# EAGLE board HomeAutomation (EAGLE 9.6.2)
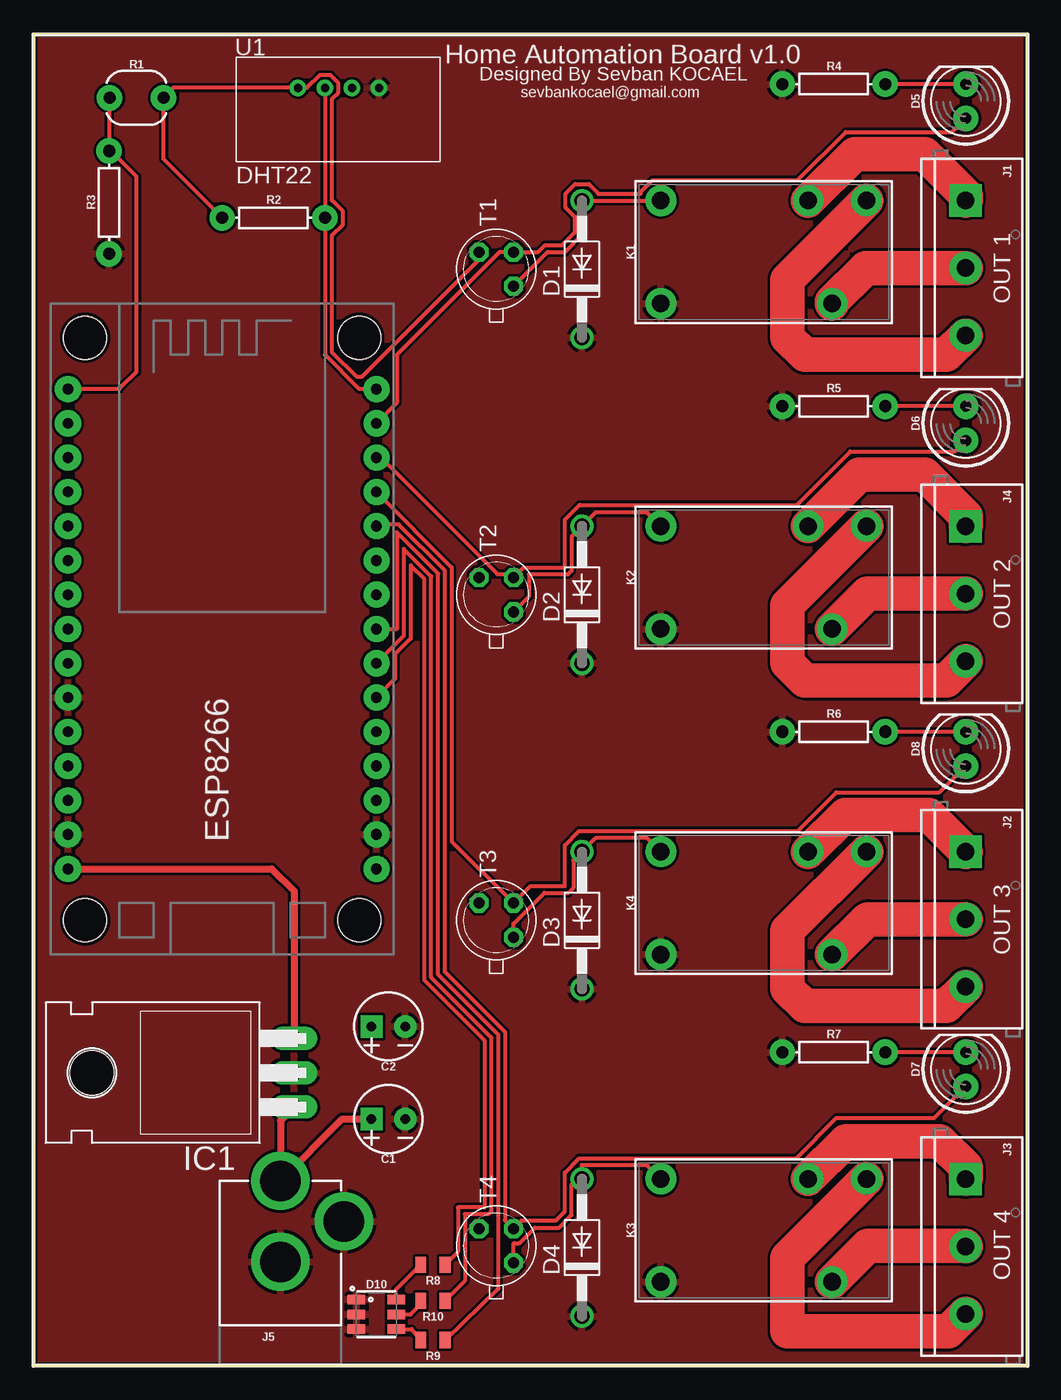
[diagram p0: board, top side]
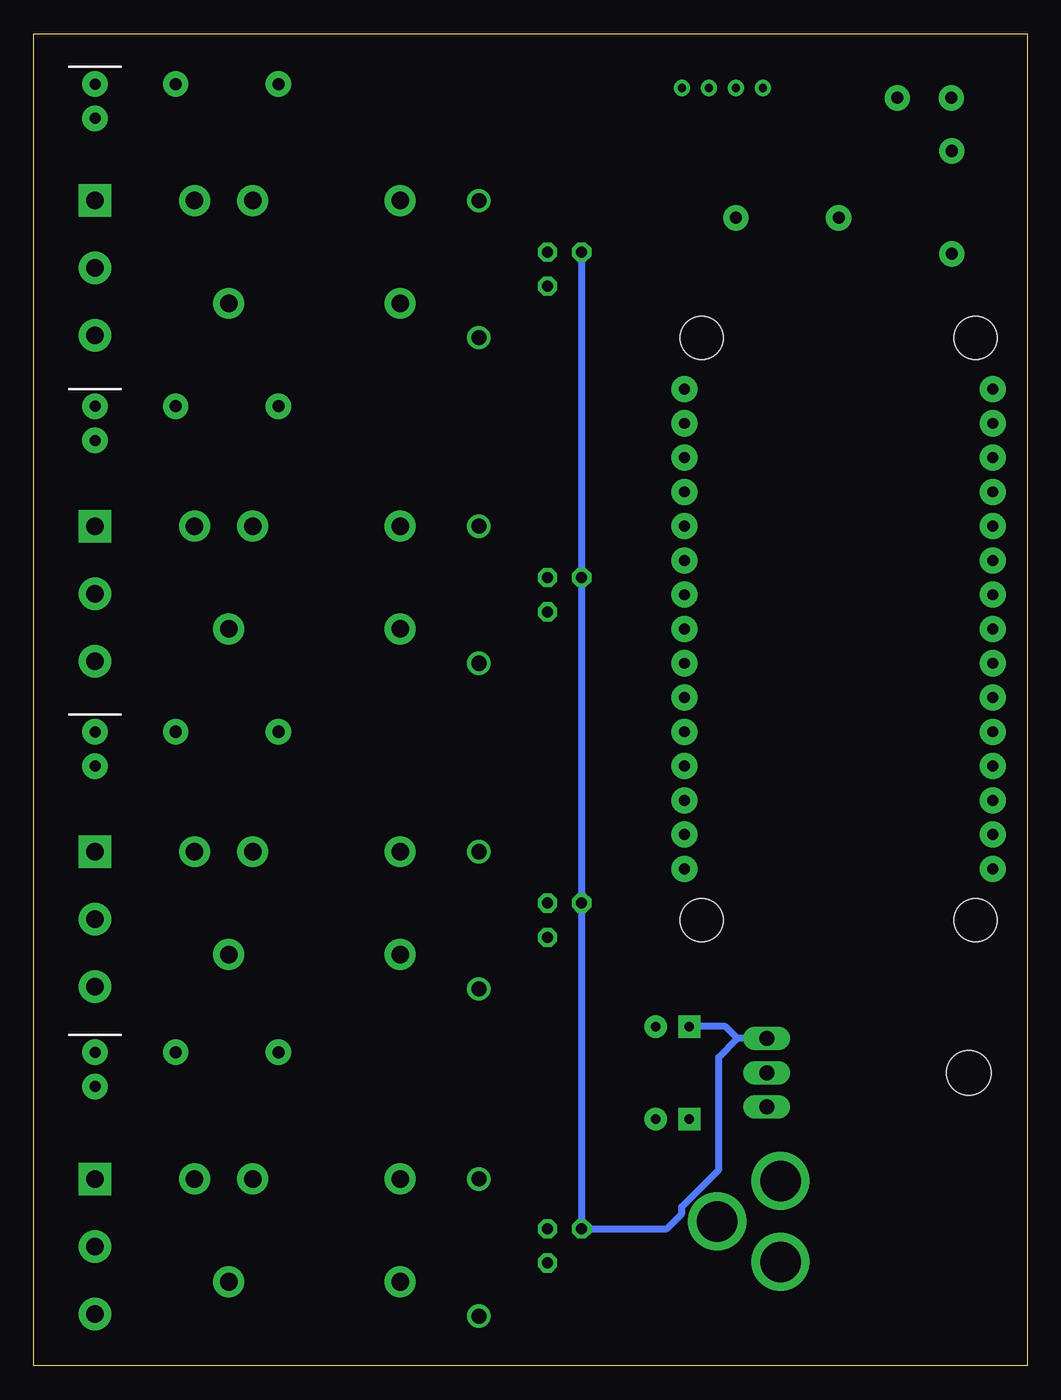
[diagram p1: board, bottom side, seen from below]

Size 73.64 x 98.73 mm. Coordinates in mm from the lower left corner, seen from the top.
Outline: 0,0 73.64,0 73.64,98.73 0,98.73 0,0
Copper layers (1*16): Top 0.035mm / dielectric 1.5mm / Bottom 0.035mm
Design rules "SparkFun": minimum track width 8mil, minimum drill 20mil, track to track 8mil, track to pad 8mil, pad to pad 8mil, via to via 8mil, smd to smd 8mil, copper to edge 10mil, drill to drill 8mil, minimum pad ring 12mil, minimum via ring 10mil, stop-mask expansion 4mil, vias tented up to drill 25mil, thermal gap 10mil

## Footprints (pad centres in the part's own frame; a part is rotated, then mirrored left to right if it is on the bottom)
CPOL-RADIAL-2.5MM-5MM-KIT = drill 0.7 pad 1.651 square: 1 1.25,0 | drill 0.7 pad 1.651: 2 -1.25,0
DO41-10 = drill 1.118: A 5.08,0; C -5.08,0
LED_5MM = drill 0.813 pad 1.88: A -1.27,0; K 1.27,0
PLCC-6-LED = smd 1.3 x 0.7: AB 1.475,1.1; AG 1.475,-1.1; AR 1.475,0; CB -1.475,1.1; CG -1.475,-1.1; CR -1.475,0
ESP12E_DEVKIT = drill 0.8 pad 1.93: 3V3@0 -11.43,-7.62; 3V3@1 11.43,5.08; 3V3@2 11.43,-17.78; AD0 -11.43,17.78; CLK -11.43,-2.54; CMD -11.43,2.54; D0 11.43,17.78; D1 11.43,15.24; D2 11.43,12.7; D3 11.43,10.16; D4 11.43,7.62; D5 11.43,0; D6 11.43,-2.54; D7 11.43,-5.08; D8 11.43,-7.62; EN -11.43,-10.16; GND@0 -11.43,-5.08; GND@1 -11.43,-15.24; GND@2 11.43,2.54; GND@3 11.43,-15.24; RST -11.43,-12.7; RSV@0 -11.43,15.24; RSV@1 -11.43,12.7; RX 11.43,-10.16; SD0 -11.43,0; SD1 -11.43,5.08; SD2 -11.43,7.62; SD3 -11.43,10.16; TX 11.43,-12.7; VIN -11.43,-17.78 | hole 3.2: -10.16,21.59; 10.16,21.59; 10.16,-21.59; -10.16,-21.59
TO220H = drill 1.118 long: 1 -2.54,-10.16; 2 0,-10.16; 3 2.54,-10.16 | hole 3.302: 0,4.826
SCREWTERMINAL-5MM-3 = drill 1.3 pad 2.413 square: 1 0,0 | drill 1.3 pad 2.413: 2 5,0; 3 10,0
POWER_JACK_PTH = drill 2.997 pad 4.318: GND 0,7.7; GNDBREAK 4.7,10.7; PWR 0,13.7
RELAY-JZC = drill 1.3 pad 2.286: 1 3.81,-8.89; 2 -3.81,2.032; 3 -3.81,6.35; 4 3.81,3.81; 5 -3.81,-8.89
PHOTOCELL-KIT = drill 0.9 pad 1.88: 1 -2,0; 2 2,0
AXIAL-0.3 = drill 0.9 pad 1.88: P$1 -3.81,0; P$2 3.81,0
0805 = smd 0.8 x 1.2: 1 -0.9,0; 2 0.9,0
TO18 = drill 0.813 octagon: 1 -1.27,-1.27; 2 1.27,-1.27; 3 1.27,1.27
DHT22 = drill 0.6: 1 -2,2; 2 0,2; 3 2,2; 4 4,2

## Placement (x,y rotation side)
C1  0.33uF  [CPOL-RADIAL-2.5MM-5MM-KIT]  26.29,18.29 180 top
C2  0.1uF  [CPOL-RADIAL-2.5MM-5MM-KIT]  26.29,25.15 180 top
D1  1N4004  [DO41-10]  40.64,81.28 90 top
D2  1N4004  [DO41-10]  40.64,57.15 90 top
D3  1N4004  [DO41-10]  40.64,33.02 90 top
D4  1N4004  [DO41-10]  40.64,8.76 90 top
D5  OUT 1  [LED_5MM]  69.09,93.73 90 top
D6  OUT 2  [LED_5MM]  69.09,69.85 90 top
D7  OUT 4  [LED_5MM]  69.09,21.97 90 top
D8  OUT 3  [LED_5MM]  69.09,45.72 90 top
D10  RGB  [PLCC-6-LED]  25.4,3.81 0 top
ESP8266  ESP12E_DEVKIT  [ESP12E_DEVKIT]  13.97,54.61 0 top
IC1  7805T  [TO220H]  9.14,21.72 90 top
J1  OUT 1  [SCREWTERMINAL-5MM-3]  69.09,86.36 270 top
J2  OUT 3  [SCREWTERMINAL-5MM-3]  69.09,38.1 270 top
J3  OUT 4  [SCREWTERMINAL-5MM-3]  69.09,13.84 270 top
J4  OUT 2  [SCREWTERMINAL-5MM-3]  69.09,62.23 270 top
J5  POWER_JACK  [POWER_JACK_PTH]  18.29,0 0 top
K1  RELAY-SPDT-JZC-11F  [RELAY-JZC]  55.37,82.55 270 top
K2  RELAY-SPDT-JZC-11F  [RELAY-JZC]  55.37,58.42 270 top
K3  RELAY-SPDT-JZC-11F  [RELAY-JZC]  55.37,10.03 270 top
K4  RELAY-SPDT-JZC-11F  [RELAY-JZC]  55.37,34.29 270 top
R1  PHOTOCELLPTH-KIT  [PHOTOCELL-KIT]  7.62,93.98 0 top
R2  1k  [AXIAL-0.3]  17.78,85.09 0 top
R3  10k  [AXIAL-0.3]  5.59,86.23 90 top
R4  330  [AXIAL-0.3]  59.31,95 0 top
R5  330  [AXIAL-0.3]  59.31,71.12 0 top
R6  330  [AXIAL-0.3]  59.31,46.99 0 top
R7  330  [AXIAL-0.3]  59.31,23.24 0 top
R8  0.3  [0805]  29.59,7.49 180 top
R9  0.3  [0805]  29.59,1.91 180 top
R10  0.3  [0805]  29.59,4.83 180 top
T1  2N2222  [TO18]  34.29,81.28 90 top
T2  2N2222  [TO18]  34.29,57.15 90 top
T3  2N2222  [TO18]  34.29,33.02 90 top
T4  2N2222  [TO18]  34.29,8.89 90 top
U1  DHT22  [DHT22]  21.59,92.71 0 top

## Library data of the parts
C1 C2 = SparkFun-Capacitors; PROD_ID: CAP-08440
D1-D4 = diode
D5-D8 = SparkFun-LED
D10 = SparkFun-LED; PROD_ID: DIO-12113
ESP8266 = esp8266
IC1 = linear
J1-J4 = SparkFun-Connectors; PROD_ID: CONN-10134; SF_SKU: PRT-08433
J5 = SparkFun-Connectors; PROD_ID: CONN-08197
K1-K4 = SparkFun-Electromechanical; PROD_ID: COMP-09533; SF_SKU: COM-00100
R1 = SparkFun-Sensors; PROD_ID: COMP-09129; SF_ID: SEN-09088
R2-R7 = SparkFun-Resistors; PROD_ID: RES-08380
R8-R10 = SparkFun-Resistors; PROD_ID: RES-11622
T1-T4 = transistor
U1 = LezzetliRobotTarifleri

## Nets
5V: C2.1 ESP8266.VIN IC1.3 R1.2 R2.P$1 T1.3 T2.3 T3.3 T4.3 U1.1
A0: ESP8266.AD0 R1.1 R3.P$2
D0: ESP8266.D0 R2.P$2 U1.2
D1: D5.A ESP8266.D1 T1.2
D2: D6.A ESP8266.D2 T2.2
D3: D8.A ESP8266.D3 T3.2
D4: D7.A ESP8266.D4 T4.2
D5: ESP8266.D5 R9.1
D6: ESP8266.D6 R10.1
D7: ESP8266.D7 R8.1
GND: C1.2 C2.2 D1.C D2.C D3.C D4.C D10.CB D10.CG D10.CR ESP8266.GND@0 ESP8266.GND@1 ESP8266.GND@3 IC1.2 J5.GND J5.GNDBREAK K1.1 K2.1 K3.1 K4.1 R3.P$1 R4.P$1 R5.P$1 R6.P$1 R7.P$1 U1.4
N$1: D1.A K1.5 T1.1
N$2: J2.1 K4.2
N$3: D2.A K2.5 T2.1
N$4: J2.2 K4.4
N$5: D3.A K4.5 T3.1
N$6: J2.3 K4.3
N$7: D4.A K3.5 T4.1
N$8: J3.1 K3.2
N$9: J3.2 K3.4
N$10: J3.3 K3.3
N$11: J4.1 K2.2
N$12: J4.2 K2.4
N$13: J4.3 K2.3
N$14: J1.3 K1.3
N$15: J1.2 K1.4
N$16: J1.1 K1.2
N$17: D5.K R4.P$2
N$18: D6.K R5.P$2
N$19: C1.1 IC1.1 J5.PWR
N$20: D8.K R6.P$2
N$21: D7.K R7.P$2
N$22: D10.AR R10.2
N$23: D10.AB R8.2
N$24: D10.AG R9.2

## Tracks (layer width: path | path; a pad name or v marks a point on that pad's centre or on a via)
5V
  Top 0.305: R2.P$1 9.62,89.44 R1.2 10.35,94.71 U1.1 20.23,94.71 21.19,95.67 21.99,95.67 22.55,95.11 22.55,94.31 22.1,93.86 22.1,86.39 22.13,86.39 22.89,85.63 22.89,84.55 22.1,83.77 22.1,75.14 23.92,73.32 24.34,73.32 33.04,82.02 33.04,82.53 T1.3
  Top 0.508: ESP8266.VIN 17.65,36.83 19.3,35.18 IC1.3
  Bottom 0.508: T1.3 T2.3 T3.3 T4.3 26.71,10.16 25.6,11.27 25.6,11.78 22.86,14.53 22.86,22.86 21.46,24.26 | 21.46,24.26 22.35,25.15 C2.1 | IC1.3 21.46,24.26
A0
  Top 0.305: R1.1 5.59,93.95 5.59,90.17 | 5.59,90.17 R3.P$2 | 5.59,90.17 7.62,88.14 7.62,73.69 | 7.62,73.66 7.62,73.69 | 7.62,73.69 6.35,72.42 6.35,72.39 ESP8266.AD0
D0
  Top 0.305: U1.2 R2.P$2 21.59,74.93 24.13,72.39 ESP8266.D0
D1
  Top 0.305: ESP8266.D1 26.92,71.37 26.92,74.93 34.54,82.55 T1.2 37.38,82.55 37.89,83.06 39.16,83.06 40.13,84.03 40.13,85.14 39.42,85.86 39.42,86.86 40.14,87.58 41.14,87.58 41.86,86.87 44.96,86.87 44.98,86.89 44.98,86.98 45.86,87.86 56.6,87.86 60.18,91.44 68.07,91.44 D5.A
D2
  Top 0.305: D6.A 68.27,67.77 60.52,67.77 56.55,63.8 40.47,63.8 39.37,62.7 39.37,59.18 36.32,59.18 35.81,58.67 | T2.2 35.81,58.67 | ESP8266.D2 25.74,67.31 34.37,58.67 35.81,58.67
D3
  Top 0.305: D8.A 67.13,42.49 59.5,42.49 56.63,39.62 40.42,39.62 39.37,38.57 39.37,35.56 36.83,35.56 T3.2 30.99,38.86 30.99,59.18 ESP8266.D3
D4
  Top 0.305: D7.A 66.75,18.36 59.51,18.36 56.52,15.37 40.42,15.37 39.37,14.32 39.37,11.43 38.68,10.74 36.14,10.74 T4.2 34.92,10.79 34.92,24.77 30.48,29.21 30.48,58.93 27.05,62.36 25.53,62.36 ESP8266.D4
D5
  Top 0.305: ESP8266.D5 26.92,54.61 26.92,61.77 29.97,58.72 29.97,29 34.42,24.55 34.42,5.7 R9.1
D6
  Top 0.305: R10.1 31.95,6.29 31.95,11.23 33.71,11.23 33.91,11.43 33.91,24.34 29.46,28.79 29.46,58.51 27.43,60.54 27.43,54.1 ESP8266.D6
D7
  Top 0.305: R8.1 31.45,8.45 31.45,11.73 33.4,11.73 33.4,24.13 28.96,28.58 28.96,58.3 27.94,59.31 27.94,53.88 26.8,52.74 26.8,50.93 ESP8266.D7 25.4,49.78
GND
  pour Top: 0,100.33 -1.27,99.06 -1.27,0 0,-1.27 73.66,-1.27 74.93,0 74.93,99.06 73.66,100.33
N$1
  Top 0.305: K1.5 D1.A 40.64,83.82 39.37,82.55 38.1,82.55 T1.1
N$2
  Top 2.54: J2.1 66.35,40.84 60.15,40.84 K4.2
N$3
  Top 0.305: K2.5 45.47,63.25 41.66,63.25 D2.A 39.88,61.47 39.88,58.93 39.62,58.67 36.7,58.67 36.7,57.02 T2.1
N$4
  Top 2.54: J2.2 61.85,33.1 61.77,33.02 61.72,33.02 K4.4
N$5
  Top 0.305: K4.5 45.47,39.12 41.66,39.12 D3.A 40,37.47 40,35.43 39.62,35.05 37.85,35.05 35.56,32.77 T3.1
N$6
  Top 2.54: K4.3 55.88,32.26 55.88,27.94 57.15,26.67 67.66,26.67 J2.3
N$7
  Top 0.305: K3.5 45.47,14.86 40.64,14.86 D4.A 40.26,13.84 39.88,13.46 39.88,11.18 38.94,10.24 37.14,10.24 36,9.09 35.64,9.09 35.56,9.02 T4.1
N$8
  Top 2.54: K3.2 60.2,16.64 67.18,16.64 69.09,14.73 J3.1
N$9
  Top 2.54: K3.4 61.85,8.89 69.04,8.89 J3.2
N$10
  Top 2.54: K3.3 55.88,8 55.88,2.54 67.79,2.54 J3.3
N$11
  Top 2.54: J4.1 69.09,62.99 66.04,66.04 61.21,66.04 K2.2
N$12
  Top 2.54: K2.4 61.8,57.23 J4.2
N$13
  Top 2.54: K2.3 55.88,56.39 55.88,52.07 57.15,50.8 67.66,50.8 J4.3
N$14
  Top 2.54: K1.3 55.88,80.52 55.88,76.2 57.15,74.93 67.66,74.93 J1.3
N$15
  Top 2.54: K1.4 59.18,78.87 61.67,81.36 J1.2
N$16
  Top 2.54: K1.2 60.86,89.81 66.04,89.81 69.09,86.77 J1.1
N$17
  Top 0.305: D5.K R4.P$2
N$18
  Top 0.305: D6.K R5.P$2
N$19
  Top 0.508: C1.1 22.88,18.29 J5.PWR 18.29,18.16 IC1.1
N$20
  Top 0.305: D8.K R6.P$2
N$21
  Top 0.305: D7.K R7.P$2
N$22
  Top 0.305: R10.2 28.69,4.56 27.94,3.81 D10.AR
N$23
  Top 0.305: R8.2 26.88,5.68 D10.AB
N$24
  Top 0.305: D10.AG 28.01,2.71 R9.2

## Text on the board
tPlace: Home Automation Board v1.0 | Designed By Sevban KOCAEL | sevbankocael@gmail.com | DHT22 | OUT 1 | OUT 2 | OUT 3 | OUT 4
tStop: Designed By Sevban KOCAEL